# Altium PCB PCB.PcbDoc
Units mm, origin at the board's own origin, x right, y up, seen from the top; angles counter-clockwise.
Board outline 59.56 x 67.82 mm, 2 copper layers (Top Layer, Bottom Layer); 22 components, 27 nets, 129 pads, 10 vias.
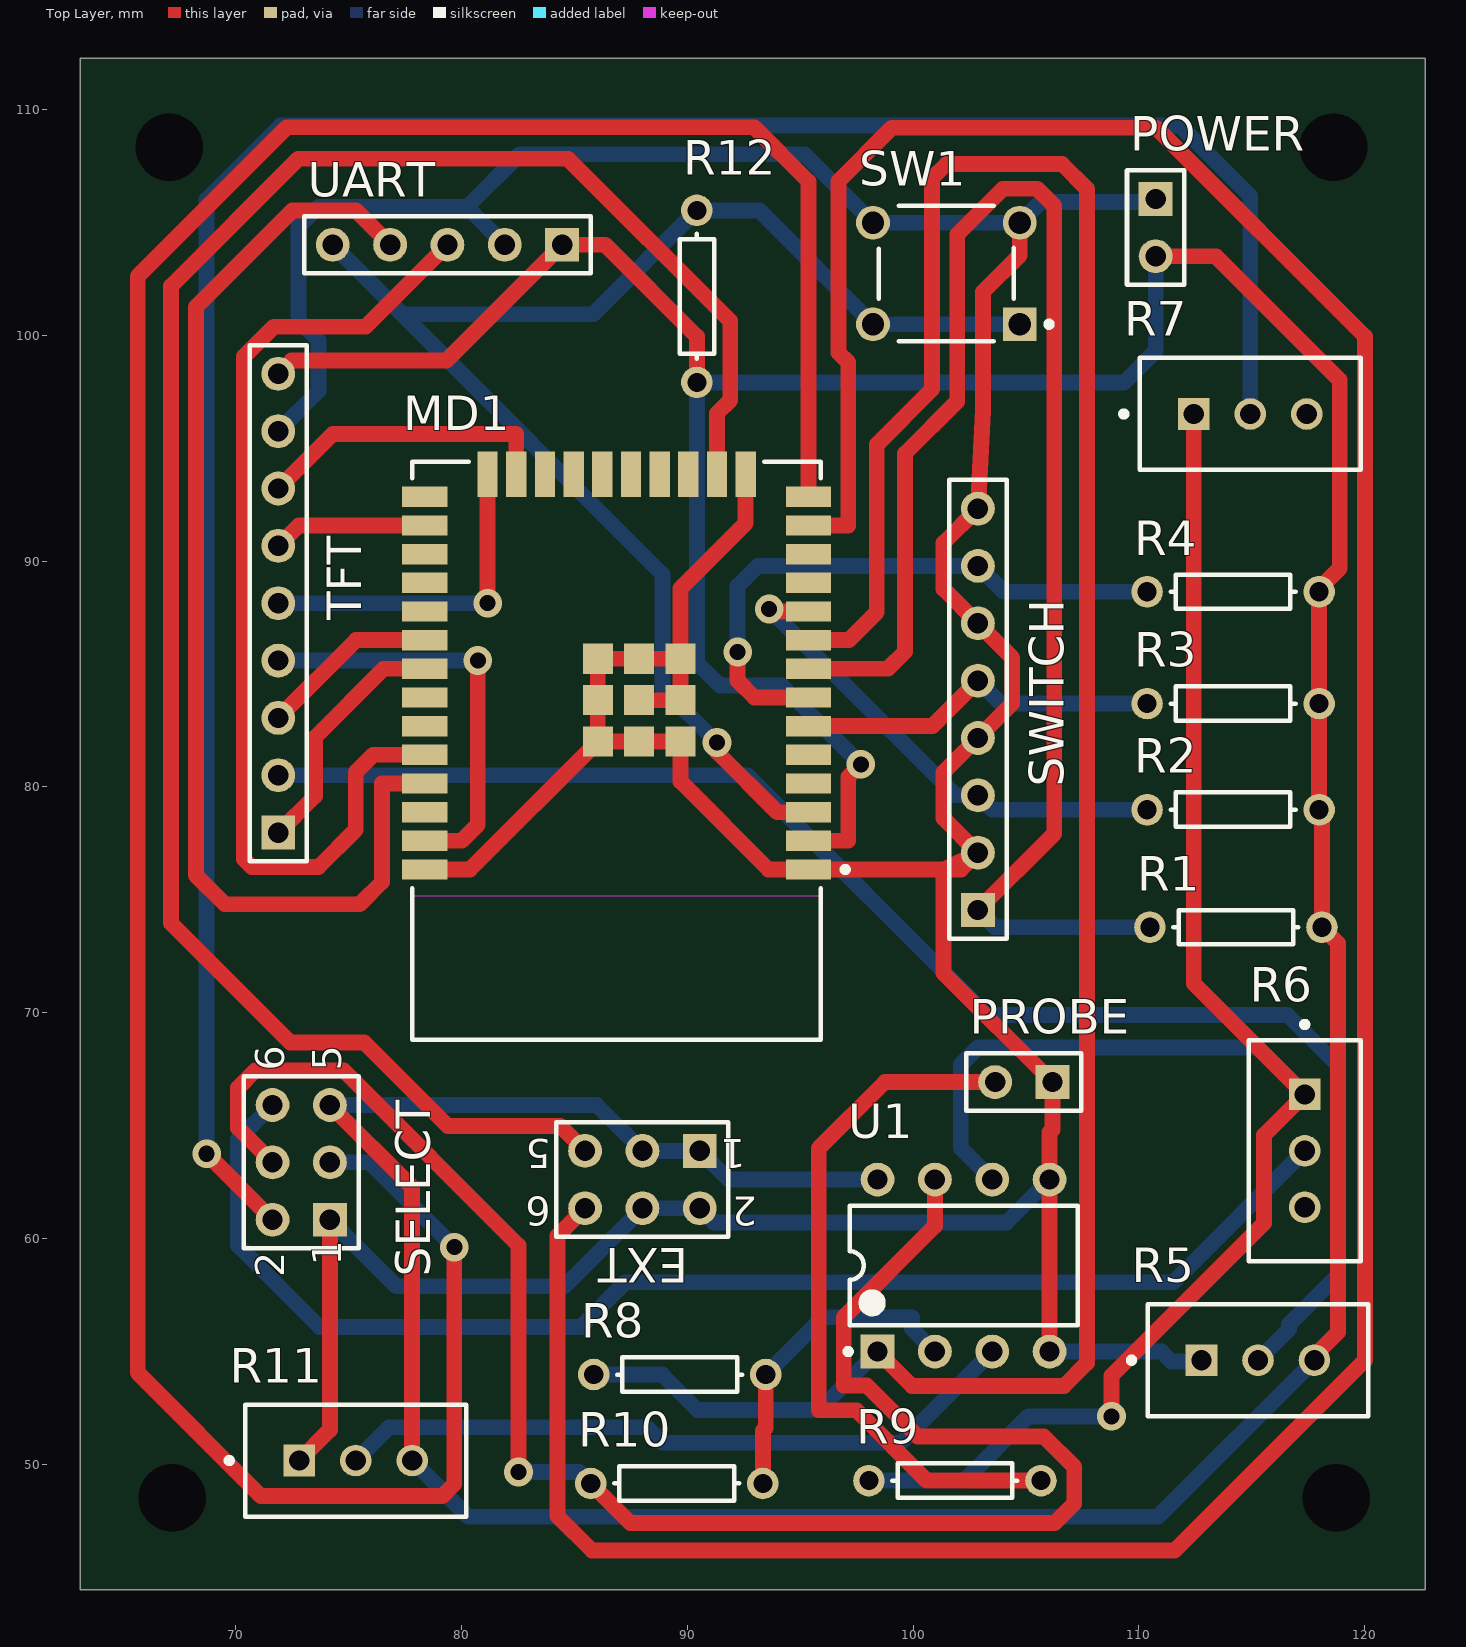
[diagram p0: Top Layer view]
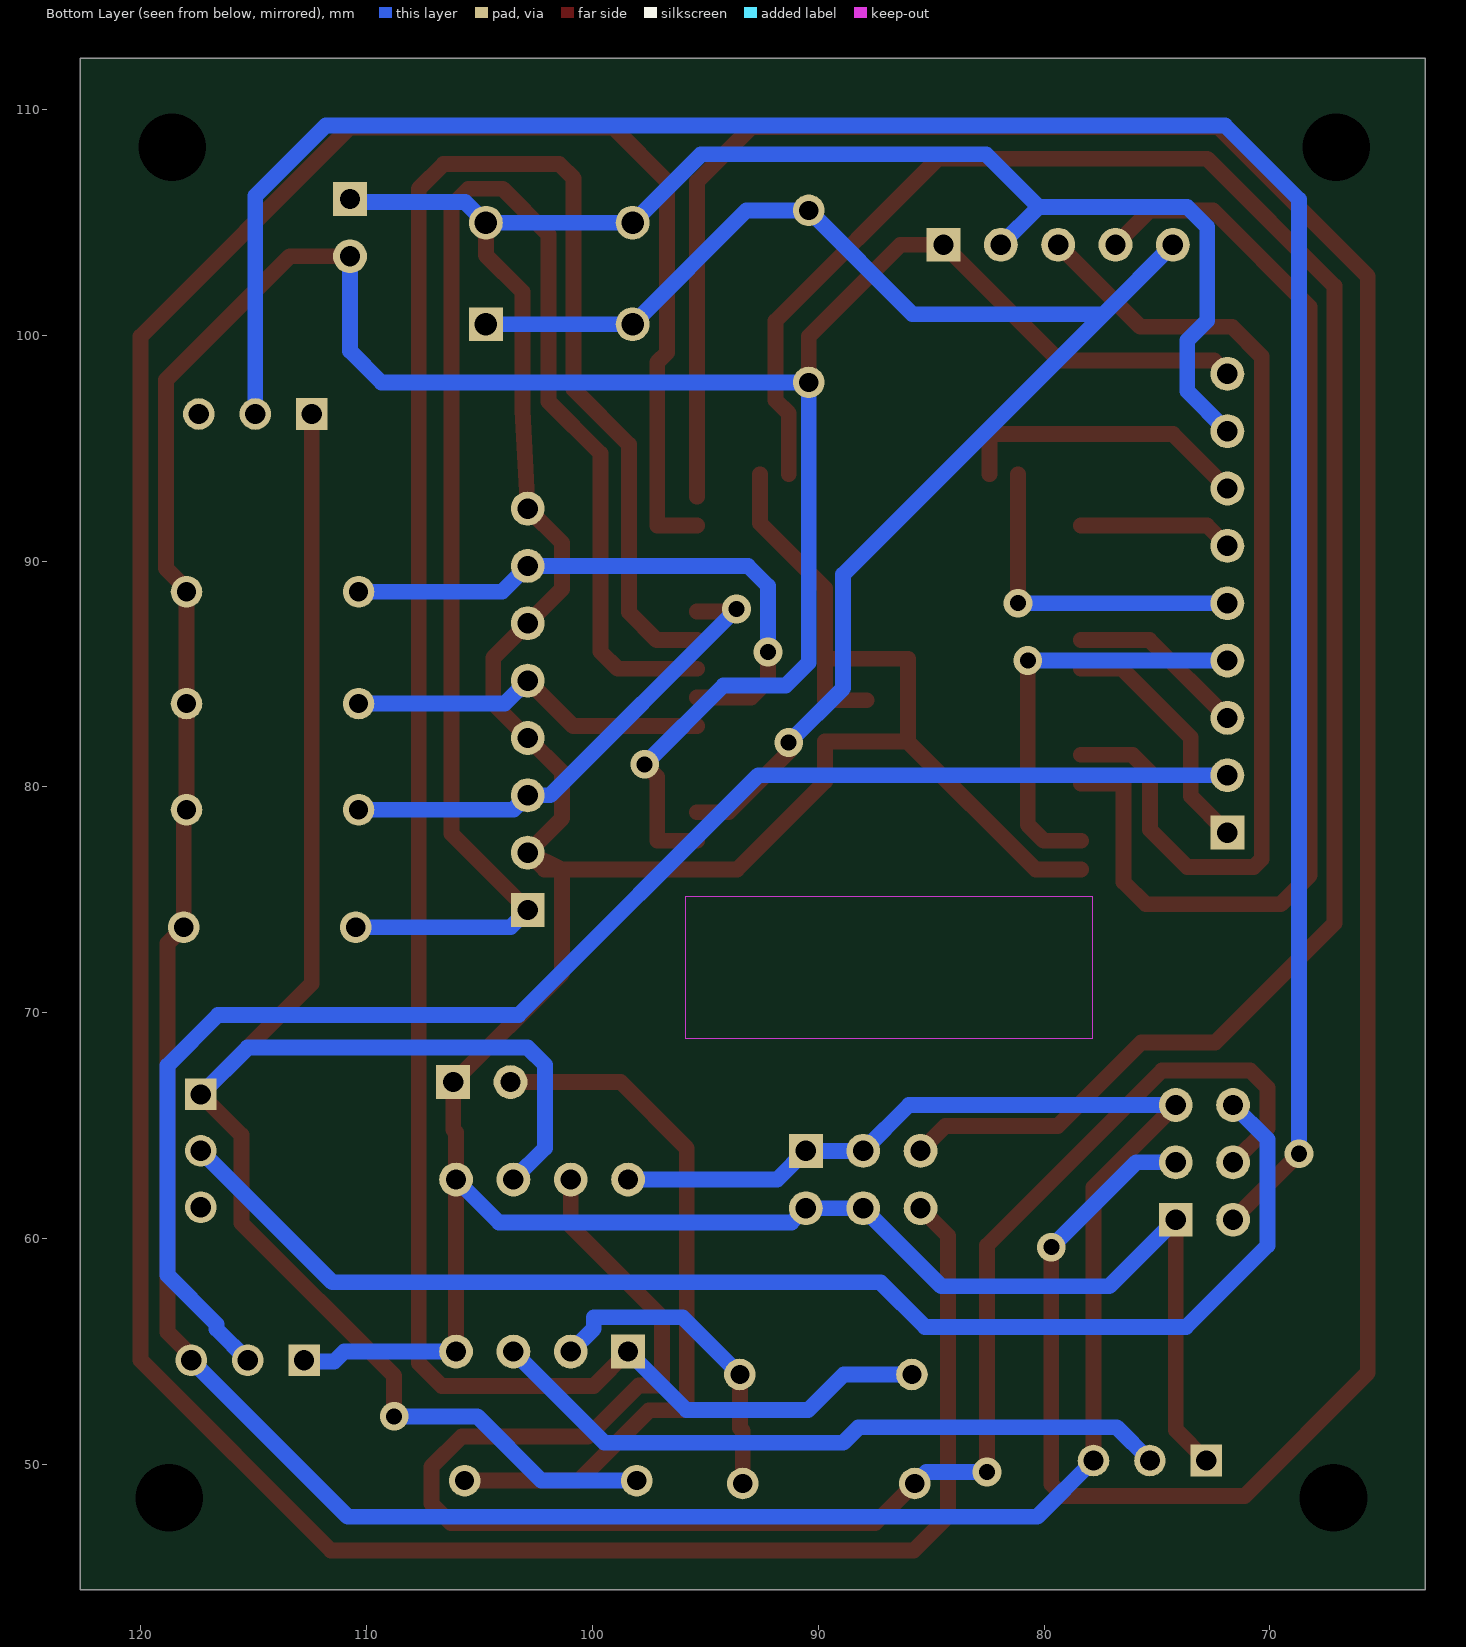
[diagram p1: Bottom Layer view, seen from below]

## Layer stack, top to bottom
Top Solder: solder mask 0.0102, Solder Resist, Dk 3.5
Top Layer: signal copper 0.0356
Dielectric 1: dielectric 0.32, FR-4, Dk 4.8
Bottom Layer: signal copper 0.0356
Bottom Solder: solder mask 0.0102, Solder Resist, Dk 3.5

## Board outline
63.119,44.45 122.682,44.45 122.682,112.268 63.119,112.268

## Design rules (kind name [scope] priority, off if disabled: settings)
Clearance [All] p1: gap=0.5 ignorepadtopadclearanceinfootprint=FALSE except(0: Arc-Hole Track-Hole SMDPad-Hole THPad-Hole Via-Hole Fill-Hole Poly-Hole Region-Hole Text-Hole; 0.254: Text-Text; 0.3: SMDPad-SMDPad SMDPad-THPad SMDPad-Via SMDPad-Fill SMDPad-Poly SMDPad-Region SMDPad-Text; 0.4: Arc-Arc Arc-Track Arc-SMDPad Arc-THPad Arc-Via Arc-Fill Arc-Poly Arc-Region Arc-Text Track-Track Track-SMDPad Track-THPad Track-Via Track-Fill Track-Poly Track-Region Track-Text)
PolygonConnect [All] p1: connectstyle=Relief reliefconductorwidth=0.254 reliefentries=4 polygonreliefangle="90 Angle" airgapwidth=0.254
RoutingVias [All] p1: holewidth=0.711 width=1.27 viastyle="Through Hole" minholewidth=0.711 minwidth=1.27 maxholewidth=0.711 maxwidth=1.27
SolderMaskExpansion [All] p1: expansion=0.102 istentingtop=FALSE
Width [All] p1: maxlimit=0.8 minlimit=0.6 preferedwidth=0.7 minimp=50.000000 maximp=50.000000 favimp=50.000000
30 further rules are at their usual default settings.

## Components (designator, comment, footprint, x,y, rotation, side; value= is the part's Value field where it differs from the comment)
EXT "Header 3X2" HDR2X3 90.551,63.881 r180 top
MD1 "ESP32-WROOM-32" FP-ESP32-WROOM-32-MFG 86.868,81.603 r180 top
POWER "Header 2" HDR1X2 110.744,106.045 r270 top
PROBE "Header 2" HDR1X2 106.172,66.929 r180 top
R1 "Res1" AXIAL-0.3 114.3,73.787 r0 top value=10K
R2 "Res1" AXIAL-0.3 114.173,78.994 r0 top value=10K
R3 "Res1" AXIAL-0.3 114.173,83.693 r0 top value=10K
R4 "Res1" AXIAL-0.3 114.173,88.646 r0 top value=10K
R5 "PV36W102C01B00" FP-PV36W-MFG 115.276,54.61 r180 top value=1kΩ
R6 "10K" FP-PV36W-MFG 117.348,63.881 r90 top value=1kΩ
R7 "100K" FP-PV36W-MFG 114.935,96.52 r180 top value=1kΩ
R8 "Res1" AXIAL-0.3 89.662,53.975 r0 top value=100K
R9 "Res1" AXIAL-0.3 101.854,49.276 r0 top value=100K
R10 "Res1" AXIAL-0.3 89.535,49.149 r180 top value=100K
R11 "100K" FP-PV36W-MFG 75.311,50.165 r180 top value=1kΩ
R12 "Res1" AXIAL-0.3 90.424,101.727 r90 top value=10K
SELECT "Header 3X2" HDR2X3 74.168,60.833 r90 top
SW1 "1825910-6" TECO-1825910-6_V 101.473,102.743 r180 top
SWITCH "Header 8" HDR1X8 102.87,74.549 r90 top
TFT "Header 9" HDR1X9 71.882,77.978 r90 top
U1 "LM358N" ONSC-PDIP-8-626-05_M 102.235,58.801 r90 top
UART "Header 5" HDR1X5 84.455,104.013 r180 top

## Footprints (in the part's own frame and the unit in brackets; to place one, negate y for a bottom-side part, rotate by r counter-clockwise, add the part's x,y. Pads: shape width x height; smd on the part's side, far side on the other; paste and mask are expansions set on the pad)
AXIAL-0.3 [mm] "Axial Device, Thru-Hole; 2 Leads; 0.3 in Pin Spacing"
  round 1.4 hole 0.85: 1(-3.81,0) 2(3.81,0)
  silkscreen extent -2.77,-0.76 2.77,0.76
FP-ESP32-WROOM-32-MFG [mm]
  rect 2x0.9 smd paste+0 mask+0: 1(-8.5,5.26) 2(-8.5,3.99) 3(-8.5,2.72) 4(-8.5,1.45) 5(-8.5,0.18) 6(-8.5,-1.09) 7(-8.5,-2.36) 8(-8.5,-3.63) 9(-8.5,-4.9) 10(-8.5,-6.17) 11(-8.5,-7.44) 12(-8.5,-8.71) 13(-8.5,-9.98) 14(-8.5,-11.25) 25(8.5,-11.25) 26(8.5,-9.98) 27(8.5,-8.71) 28(8.5,-7.44) 29(8.5,-6.17) 30(8.5,-4.9) 31(8.5,-3.63) 32(8.5,-2.36) 33(8.5,-1.09) 34(8.5,0.18) 35(8.5,1.45) 36(8.5,2.72) 37(8.5,3.99) 38(8.5,5.26)
  rect 0.9x2 smd paste+0 mask+0: 15(-5.715,-12.25) 16(-4.445,-12.25) 17(-3.175,-12.25) 18(-1.905,-12.25) 19(-0.635,-12.25) 20(0.635,-12.25) 21(1.905,-12.25) 22(3.175,-12.25) 23(4.445,-12.25) 24(5.715,-12.25)
  rect 1.33x1.33 smd paste+0 mask+0: 39(-2.835,-0.405) 39(-2.835,-4.075) 39(-2.835,-2.24) 39(-1,-0.405) 39(-1,-2.24) 39(-1,-4.075) 39(0.835,-0.405) 39(0.835,-2.24) 39(0.835,-4.075)
  Keep-Out Layer region: -9,6.45 9,6.45 9,12.75 -9,12.75
  Keep-Out Layer region: -9,6.45 9,6.45 9,12.75 -9,12.75
  silkscreen extent -10.25,-12.8 9.05,12.8, body extent -9.6,-13.35 9.6,12.9, height 0.25
FP-PV36W-MFG [mm]
  rect 1.4x1.4 hole 0.9 paste-1000 mask+0: 1(2.5,0)
  round 1.4 hole 0.9 paste-1000 mask+0: 2(0,0) 3(-2.5,0)
  silkscreen extent -4.89,-2.48 5.72,2.48, body extent -4.99,-2.58 4.99,2.58, height 0.25
HDR1X2 [mm] "Connector; Header; 2 Position"
  rect 1.5x1.5 hole 0.9: 1(0,0)
  round 1.5 hole 0.9: 2(2.54,0)
  silkscreen extent -1.27,-1.27 3.81,1.27
HDR1X5 [mm] "Connector; Header; 5 Position"
  rect 1.5x1.5 hole 0.9: 1(0,0)
  round 1.5 hole 0.9: 2(2.54,0) 3(5.08,0) 4(7.62,0) 5(10.16,0)
  silkscreen extent -1.27,-1.27 11.43,1.27
HDR1X8 [mm] "Connector; Header; 8 Position"
  rect 1.5x1.5 hole 0.9: 1(0,0)
  round 1.5 hole 0.9: 2(2.54,0) 3(5.08,0) 4(7.62,0) 5(10.16,0) 6(12.7,0) 7(15.24,0) 8(17.78,0)
  silkscreen extent -1.27,-1.27 19.05,1.27
HDR1X9 [mm] "Connector; Header; 9 Position"
  rect 1.5x1.5 hole 0.9: 1(0,0)
  round 1.5 hole 0.9: 2(2.54,0) 3(5.08,0) 4(7.62,0) 5(10.16,0) 6(12.7,0) 7(15.24,0) 8(17.78,0) 9(20.32,0)
  silkscreen extent -1.27,-1.27 21.59,1.27
HDR2X3 [mm] "Connector; Header; 3x2 Position"
  rect 1.5x1.5 hole 0.9: 1(0,0)
  round 1.5 hole 0.9: 2(0,2.54) 3(2.54,0) 4(2.54,2.54) 5(5.08,0) 6(5.08,2.54)
  silkscreen extent -1.27,-1.27 6.35,3.81
ONSC-PDIP-8-626-05_M [mm] "DIP, 8-Leads, Body 10x7.1mm, Pitch 2.54mm"
  rect 1.5x1.5 hole 0.9: 1(-3.81,3.81)
  round 1.5 hole 0.9: 2(-3.81,1.27) 3(-3.81,-1.27) 4(-3.81,-3.81) 5(3.81,-3.81) 6(3.81,-1.27) 7(3.81,1.27) 8(3.81,3.81)
  silkscreen extent -3.93,-5.05 2.65,5.23, body extent -3.95,-5 3.95,5, height 5.33
TECO-1825910-6_V [mm] "Switch, 4-Leads, Body 5.99x5.99mm"
  rect 1.5x1.5 hole 0.99: 1(-3.25,2.25)
  round 1.5 hole 0.99: 2(3.25,2.25) 3(-3.25,-2.25) 4(3.25,-2.25)
  silkscreen extent -4.68,-3 3,3, body extent -3,-2.99 2.99,3, height 5

## Part data
EXT SELECT: "Header, 3-Pin, Dual row", LatestRevisionDate=17-Jul-2002, LatestRevisionNote="Re-released for DXP Platform.", Publisher="Altium Limited"
MD1: library part CMP-194065-000008-1, "RX TXRX MOD WIFI SURFACE MOUNT", Case/Package=SMD/SMT, Frequency=2.5GHz, Max Operating Temperature=85°C, Min Operating Temperature=-40°C, Operating Supply Voltage=3.6V, Package Quantity=550, Data Rate=150Mbps, Mount="Surface Mount", Packaging="Cut Tape", Sensitivity=-98dBm, Weight=0.088185oz
POWER PROBE: "Header, 2-Pin", LatestRevisionDate=17-Jul-2002, LatestRevisionNote="Re-released for DXP Platform.", Publisher="Altium Limited"
R1 R2 R3 R4 R8 R9 R10 R12: "Resistor", LatestRevisionDate=17-Jul-2002, LatestRevisionNote="Re-released for DXP Platform.", PackageDescription="Axial Device, Thru-Hole; 2 Leads; 0.3 in Pin Spacing", PackageReference=AXIAL-0.3, Published=8-Jun-2000, Publisher="Altium Limited"
R5: library part CMP-07234-000009-1, "TRIMMER 1K OHM 0.5W PC PIN TOP", Manufacturer=Bourns, Package=PV36W, Power Rating=0.5W, Resistance=1kΩ, Temperature="-55°C to +125°C", Temperature Coefficient=100ppm/°C, Temperature Range High=+125°C, Temperature Range Low=-55°C, Tolerance=10%, Automotive=No, Category=Res, ComponentLink2Description=Datasheet, ComponentLink2URL=https://www.bourns.com/docs/Product-Datasheets/pv36.pdf, Composition=Cermet, Device Class L1="Passive Components", Device Class L2=Resistors, Device Class L3="Variable Resistors and Potentiometers", Digikey Description="TRIMMER 1K OHM 0.5W PC PIN TOP", Height=12.05mm, Lead Free=Yes, Manufacturer Part Number=PV36W102C01B00, Mouser Description="Trimmer Resistors - Through Hole 1.0Kohms 10mm Square 25turn", Octopart=https://octopart.com/pv36w102c01b00-bourns-71612321, RoHS=TRUE, Series=PV36, Standoff Height=0.38mm
R6 R7 R11: library part CMP-07234-000009-1, "TRIMMER 1K OHM 0.5W PC PIN TOP", Manufacturer=Bourns, Manufacturer Part Number=PV36W102C01B00, Package=PV36W, Power Rating=0.5W, Resistance=1kΩ, Temperature="-55°C to +125°C", Temperature Coefficient=100ppm/°C, Temperature Range High=+125°C, Temperature Range Low=-55°C, Tolerance=10%, Automotive=No, Category=Res, ComponentLink2Description=Datasheet, ComponentLink2URL=https://www.bourns.com/docs/Product-Datasheets/pv36.pdf, Composition=Cermet, Device Class L1="Passive Components", Device Class L2=Resistors, Device Class L3="Variable Resistors and Potentiometers", Digikey Description="TRIMMER 1K OHM 0.5W PC PIN TOP", Height=12.05mm, Lead Free=Yes, Mouser Description="Trimmer Resistors - Through Hole 1.0Kohms 10mm Square 25turn", Octopart=https://octopart.com/pv36w102c01b00-bourns-71612321, RoHS=TRUE, Series=PV36, Standoff Height=0.38mm
SW1: library part CMP-1684-00021-1, "Tact Switch, SPST-NO, 0.05 A, -35 to 85 degC, 4-Pin THD, RoHS, Bulk", Actuator Color=Black, Contact Rating @ Voltage=0.05A@24VDC, Dielectric Strength=500VAC, Manufacturer="TE Connectivity", Maximum AC Voltage Rating=N/A, Maximum Contact Resistance=100mOhm, Maximum DC Voltage Rating=24V, Minimum Insulation Resistance=100MOhm, Operating Temperature=-35to85C, Package Description="4-Pin Through Hole Device, Body 5.99 x 5.99 mm, Pitch 6.5 mm", Package Reference=THD, Actuator Length=1.4mm, Actuator Material=PolybutyleneTerephthalate, Actuator Style=RoundButton, Base Material=N/A, Body Orientation=Straight, Bushing Type=Unthreaded, Contact Material=CopperAlloy, Contact Plating=Silver, Datasheet URL=http://www.te.com/commerce/DocumentDelivery/DDEController?Action=showdoc&DocId=Customer+Drawing%7F1825910%7FC9%7Fpdf%7FEnglish%7FENG_CD_1825910_C9.pdf%7F1825910-6, Datasheet Version="Rev. C9", Dimension=5.99x5mm, Electrical Life=100000Cycles, Family=1825910, Function=MomentaryContact, Housing Material=N/A, Illumination=N/R, Manufacturer URL=http://www.te.com, Mechanical Life=100000Cycles, Mounting=ThroughHole, Packaging=N/A, Part No=1825910-6, Pole Throw Configuration=SPST, Product Weight=N/A, RoHS=Yes, Seal Description=N/A, Seal Location=N/A, Switch Configuration=OFF(ON), Terminal Type=PCPins, Thread Size=N/R
SWITCH: "Header, 8-Pin", LatestRevisionDate=17-Jul-2002, LatestRevisionNote="Re-released for DXP Platform.", Publisher="Altium Limited"
TFT: "Header, 9-Pin", LatestRevisionDate=17-Jul-2002, LatestRevisionNote="Re-released for DXP Platform.", Publisher="Altium Limited"
U1: library part CMP-1310-00098-1, "Single Supply Dual Operational Amplifier, 3 to 32 V, 0 to 70 degC, 8-Pin PDIP, Tube", Manufacturer="On Semiconductor", ComponentLink1Description="Manufacturer URL", ComponentLink1URL=http://www.onsemi.com/, ComponentLink2Description=Datasheet, ComponentLink2URL=http://www.onsemi.cn/pub_link/Collateral/LM358-D.PDF, ComponentLink3Description="Package Specification", ComponentLink3URL=http://www.onsemi.com/pub_link/Collateral/LM211-D.PDF, DatasheetVersion="Rev. 27", Mounting Technology="Through Hole", PackageDescription="8-Pin Plastic Dual-In Line Package, Body 9.52 x 6.605 mm, Pitch 2.54 mm", PackageReference=PDIP-8-626-05, PackageVersion="Rev. M, 04/2010", Packing=Tube, PartNumber=LM358N, RoHS=FALSE, VCC Max (V)=32, VCC Min (V)=3
UART: "Header, 5-Pin", LatestRevisionDate=17-Jul-2002, LatestRevisionNote="Re-released for DXP Platform.", Publisher="Altium Limited"

## Free pads (board coordinates)
  round 1.524 hole 3: 2(67.056,108.331) 2(67.183,48.514) 2(118.618,108.331) 2(118.745,48.514)

## Via types
v1: diameter 1.27, hole 0.711, Top Layer to Bottom Layer, 10 vias

## Nets (pads, with @x,y where several pads share a name; then routed paths per layer and width w, separated by ;. In a path a pad name is that pad's centre, name@x,y a point inside that pad or via, vN(x,y) a via of type N, cw(c..) or ccw(c..) an arc to the next point about the centre after c; other vN are vias at no path point)
ADC_IN: MD1.9 R8.1 U1.1 | length 108
  Top Layer w0.7: MD1.9 97.155,86.503 98.388,87.736 98.388,95.162 100.838,97.612 100.838,106.955 101.476,107.593 106.596,107.593 107.696,106.493 107.696,54.483 106.68,53.467 99.949,53.467 U1.1
  Bottom Layer w0.7: R8.1 88.875,53.975 90.449,52.4 95.834,52.4 U1.1
BTN1: MD1.8 R1.1 SWITCH.1 | length 70
  Top Layer w0.7: MD1.8 98.882,85.233 99.644,85.995 99.644,94.767 101.956,97.079 101.956,104.47 103.978,106.493 105.495,106.493 106.248,105.74 106.248,77.927 SWITCH.1
  Bottom Layer w0.7: SWITCH.1 103.632,73.787 R1.1
BTN2: MD1.10 R2.1 SWITCH.3 | length 22.3
  Top Layer w0.7: v1(93.624,87.884) 93.735,87.773 MD1.10
  Bottom Layer w0.7: v1(93.624,87.884) 101.879,79.629 SWITCH.3 103.505,78.994 R2.1@110.49,78.994
BTN3: MD1.6 R3.1 SWITCH.5 | length 16.3
  Top Layer w0.7: MD1.6 100.854,82.693 SWITCH.5
  Bottom Layer w0.7: SWITCH.5 103.886,83.693 R3.1
BTN4: MD1.7 R4.1 SWITCH.7 | length 26.5
  Top Layer w0.7: v1(92.227,85.979) 92.227,84.709 92.973,83.963 MD1.7
  Bottom Layer w0.7: v1(92.227,85.979) 92.227,88.9 93.116,89.789 SWITCH.7 104.013,88.646 R4.1@110.236,88.646
CS: MD1.23 TFT.7 | length 13.3
  Top Layer w0.7: TFT.7 74.295,95.631 82.423,95.631 MD1.23
DC: MD1.24 TFT.5 | length 15
  Top Layer w0.7: v1(81.153,88.138) MD1.24
  Bottom Layer w0.7: TFT.5 v1(81.153,88.138)
DTR: MD1.3 R12.2 SW1.1 SW1.2 UART.5 | length 66
  Top Layer w0.7: v1(91.313,81.966) 91.313,81.55 93.98,78.883 MD1.3
  Bottom Layer w0.7: UART.5 77.368,100.94 ; v1(91.313,81.966) 88.9,84.379 88.9,89.408 77.368,100.94 ; SW1.1 SW1.2 93.179,105.537 R12.2 85.827,100.94 77.368,100.94
GND: EXT.2 EXT.4 MD1.1 MD1.15 MD1.38 MD1.39 POWER.1 PROBE.1 R5.1 R11.1 SELECT.1 SW1.3 SW1.4 SWITCH.2 SWITCH.4 SWITCH.6 SWITCH.8 TFT.8 U1.4 U1.5 UART.2 | length 215.6
  Top Layer w0.7: R11.1 74.168,51.522 SELECT.1 ; MD1.38 80.368,76.343 MD1.39@86.033,82.008 ; MD1.39@87.868,83.843 89.703,83.843 MD1.39@89.703,85.678 ; MD1.15 92.583,91.678 89.703,88.798 MD1.39@89.703,85.678 ; SW1.3 104.723,103.555 103.099,101.93 103.099,96.672 SWITCH.8 101.346,90.805 101.346,88.773 SWITCH.6 104.394,85.725 104.394,83.693 SWITCH.4 101.346,80.645 101.346,78.613 SWITCH.2 ; U1.4 U1.5 106.045,64.694 106.172,64.821 PROBE.1 101.346,71.755 101.346,76.343 ; MD1.39@86.033,82.008 86.033,83.843 86.033,85.678 87.868,85.678 MD1.39@89.703,85.678 ; MD1.39@86.033,82.008 87.868,82.008 89.703,82.008 89.703,80.239 93.599,76.343 MD1.1 101.346,76.343 ; 101.346,76.343 102.124,76.343 SWITCH.2 ; 101.346,76.343 SWITCH.2
  Bottom Layer w0.7: TFT.8 73.66,97.536 73.66,99.771 72.771,100.66 72.771,104.8 73.66,105.689 80.239,105.689 ; SELECT.1 77.114,57.887 84.557,57.887 EXT.4 EXT.2 91.186,60.706 104.14,60.706 U1.5 ; UART.2 80.239,105.689 ; U1.4 110.998,54.991 111.436,54.553 112.719,54.553 R5.1 ; POWER.1@110.744,105.903 105.633,105.903 SW1.3 SW1.4 95.19,108.026 82.575,108.026 80.239,105.689
IO13: EXT.5 MD1.16 | length 87.8
  Top Layer w0.7: EXT.5 84.371,64.981 79.393,64.981 75.692,68.682 72.415,68.682 67.132,73.965 67.132,102.184 72.771,107.823 84.709,107.823 91.897,100.635 91.897,97.13 91.313,96.545 MD1.16
IO14: EXT.6 MD1.13 | length 144.7
  Top Layer w0.7: EXT.6 84.252,60.122 84.252,47.701 85.776,46.177 111.582,46.177 120.015,54.61 120.015,99.949 110.769,109.195 99.06,109.195 96.698,106.832 96.698,99.238 97.13,98.806 97.13,91.583 MD1.13
LED: R5.2 TFT.2 | length 66.8
  Bottom Layer w0.7: TFT.2 92.659,80.518 103.276,69.901 116.586,69.901 118.821,67.666 118.821,58.369 116.654,56.202 116.654,55.988 R5.2
MISO: MD1.31 TFT.1 | length 11
  Top Layer w0.7: TFT.1 73.505,79.601 73.505,82.194 76.544,85.233 MD1.31
MOSI: MD1.37 TFT.4 | length 18.8
  Top Layer w0.7: MD1.37 80.01,77.613 80.721,78.324 v1(80.721,85.598)
  Bottom Layer w0.7: TFT.4 v1(80.721,85.598)
NetPROBE_2: PROBE.2 R9.2 | length 31.8
  Top Layer w0.7: PROBE.2 98.755,66.929 95.825,63.999 95.825,52.391 97.494,52.391 100.609,49.276 R9.2
NetR6_1: R6.1 R7.1 R9.1 U1.6 | length 84
  Top Layer w0.7: v1(108.788,52.121) 108.788,53.924 115.545,60.681 115.545,64.578 R6.1 112.435,71.294 R7.1
  Bottom Layer w0.7: R9.1 102.26,49.276 105.105,52.121 v1(108.788,52.121) ; U1.6 102.108,64.008 102.108,67.691 102.87,68.453 115.276,68.453 R6.1
NetR6_2: R6.2 SELECT.6 | length 58.8
  Bottom Layer w0.7: SELECT.6 70.104,64.389 70.104,59.69 73.711,56.083 85.268,56.083 87.249,58.064 111.531,58.064 R6.2
NetR7_2: R7.2 SELECT.2 | length 104.9
  Top Layer w0.7: v1(68.707,63.754) SELECT.2
  Bottom Layer w0.7: v1(68.707,63.754) 68.707,106.02 71.984,109.296 111.811,109.296 114.935,106.172 R7.2
NetR8_2: R8.2 R10.1 U1.2 | length 14.4
  Top Layer w0.7: R10.1 93.345,51.486 93.472,51.613 R8.2
  Bottom Layer w0.7: R8.2 96.012,56.515 99.949,56.515 99.949,56.007 U1.2
NetR10_2: R10.2 SELECT.4 U1.7 | length 79.9
  Top Layer w0.7: SELECT.4 70.104,64.897 70.104,66.675 70.866,67.437 74.778,67.437 82.525,59.69 v1(82.525,49.657) ; R10.2 87.478,47.396 106.274,47.396 107.137,48.26 107.137,49.886 105.791,51.232 100.209,51.232 97.95,53.491 96.925,53.491 96.925,56.515 100.965,60.555 U1.7
  Bottom Layer w0.7: v1(82.525,49.657) 85.217,49.657 R10.2
NetR11_2: R11.2 U1.3 | length 30.8
  Bottom Layer w0.7: R11.2 76.784,51.638 88.214,51.638 88.9,50.952 99.466,50.952 U1.3
RESET: MD1.26 TFT.6 | length 6.9
  Top Layer w0.7: TFT.6 72.787,91.583 MD1.26
RX: MD1.35 UART.4 | length 51.6
  Top Layer w0.7: UART.4 75.311,105.537 72.517,105.537 68.232,101.252 68.232,76.091 69.52,74.803 75.489,74.803 76.479,75.794 76.479,80.153 MD1.35
SCK: MD1.30 TFT.3 | length 7.9
  Top Layer w0.7: TFT.3 75.327,86.503 MD1.30
SS: MD1.14 SELECT.3 | length 130
  Top Layer w0.7: v1(79.68,59.614) 79.68,49.124 79.146,48.59 71.12,48.59 65.659,54.051 65.659,102.616 72.263,109.22 92.964,109.22 95.368,106.816 MD1.14
  Bottom Layer w0.7: SELECT.3 75.921,63.373 v1(79.68,59.614)
TX: MD1.34 UART.3 | length 45
  Top Layer w0.7: MD1.34 76.089,81.423 75.311,80.645 75.311,78.105 73.66,76.454 70.714,76.454 70.358,76.81 70.358,99.06 71.679,100.381 75.743,100.381 UART.3
VCC: EXT.1 EXT.3 MD1.2 POWER.2 R1.2 R2.2 R3.2 R4.2 R5.3 R11.3 R12.1 SELECT.5 TFT.9 U1.8 UART.1 | length 218.4
  Top Layer w0.7: TFT.9 72.466,98.882 79.324,98.882 UART.1 86.36,104.013 90.424,99.949 R12.1 ; SELECT.5 77.811,62.27 R11.3 ; MD1.2 97.13,77.613 97.13,80.442 v1(97.688,81.001) ; POWER.2 113.411,103.505 118.897,98.019 118.897,89.687 R4.2@117.856,88.646 ; R5.3 117.776,54.799 118.821,55.845 118.821,73.076 R1.2 118.11,78.867 R2.2 R3.2 R4.2
  Bottom Layer w0.7: SELECT.5 85.979,65.913 EXT.3 EXT.1 91.821,62.611 U1.8 ; R11.3 80.3,47.676 110.842,47.676 R5.3 ; v1(97.688,81.001) 94.195,84.494 91.44,84.494 90.424,85.51 R12.1 109.347,97.917 110.744,99.314 POWER.2
pads on no net: MD1.4 MD1.5 MD1.11 MD1.12 MD1.17 MD1.18 MD1.19 MD1.20 MD1.21 MD1.22 MD1.25 MD1.27 MD1.28 MD1.29 MD1.32 MD1.33 MD1.36 R6.3 R7.3

## Silkscreen, mask and mechanical layers (free items; w line width, h text height)
Board Outline:
  the board outline again, w0.254

## Text inside footprints (layer, text, board x,y; h text height)
EXT: Top Overlay "6" at 83.947,61.849 h1.27 r180; Top Overlay "5" at 83.947,64.389 h1.27 r180; Top Overlay "2" at 93.091,61.849 h1.27 r180; Top Overlay "1" at 92.583,64.389 h1.27 r180
SELECT: Top Overlay "6" at 72.136,67.437 h1.27 r90; Top Overlay "5" at 74.676,67.437 h1.27 r90; Top Overlay "2" at 72.136,58.293 h1.27 r90; Top Overlay "1" at 74.676,58.801 h1.27 r90